# Altium PCB PCB2.PcbDoc (part 1 of 3)
Units mm, origin at the board's own origin, x right, y up, seen from the top; angles counter-clockwise.
Board outline 152.4 x 101.6 mm, 4 copper layers (Top Layer, Int1 (GND), Int2 (PWR), Bottom Layer), stack 1.569 mm thick; 115 components, 81 nets, 561 pads, 241 vias.
Unrouted connection lines stored in the file: 9.
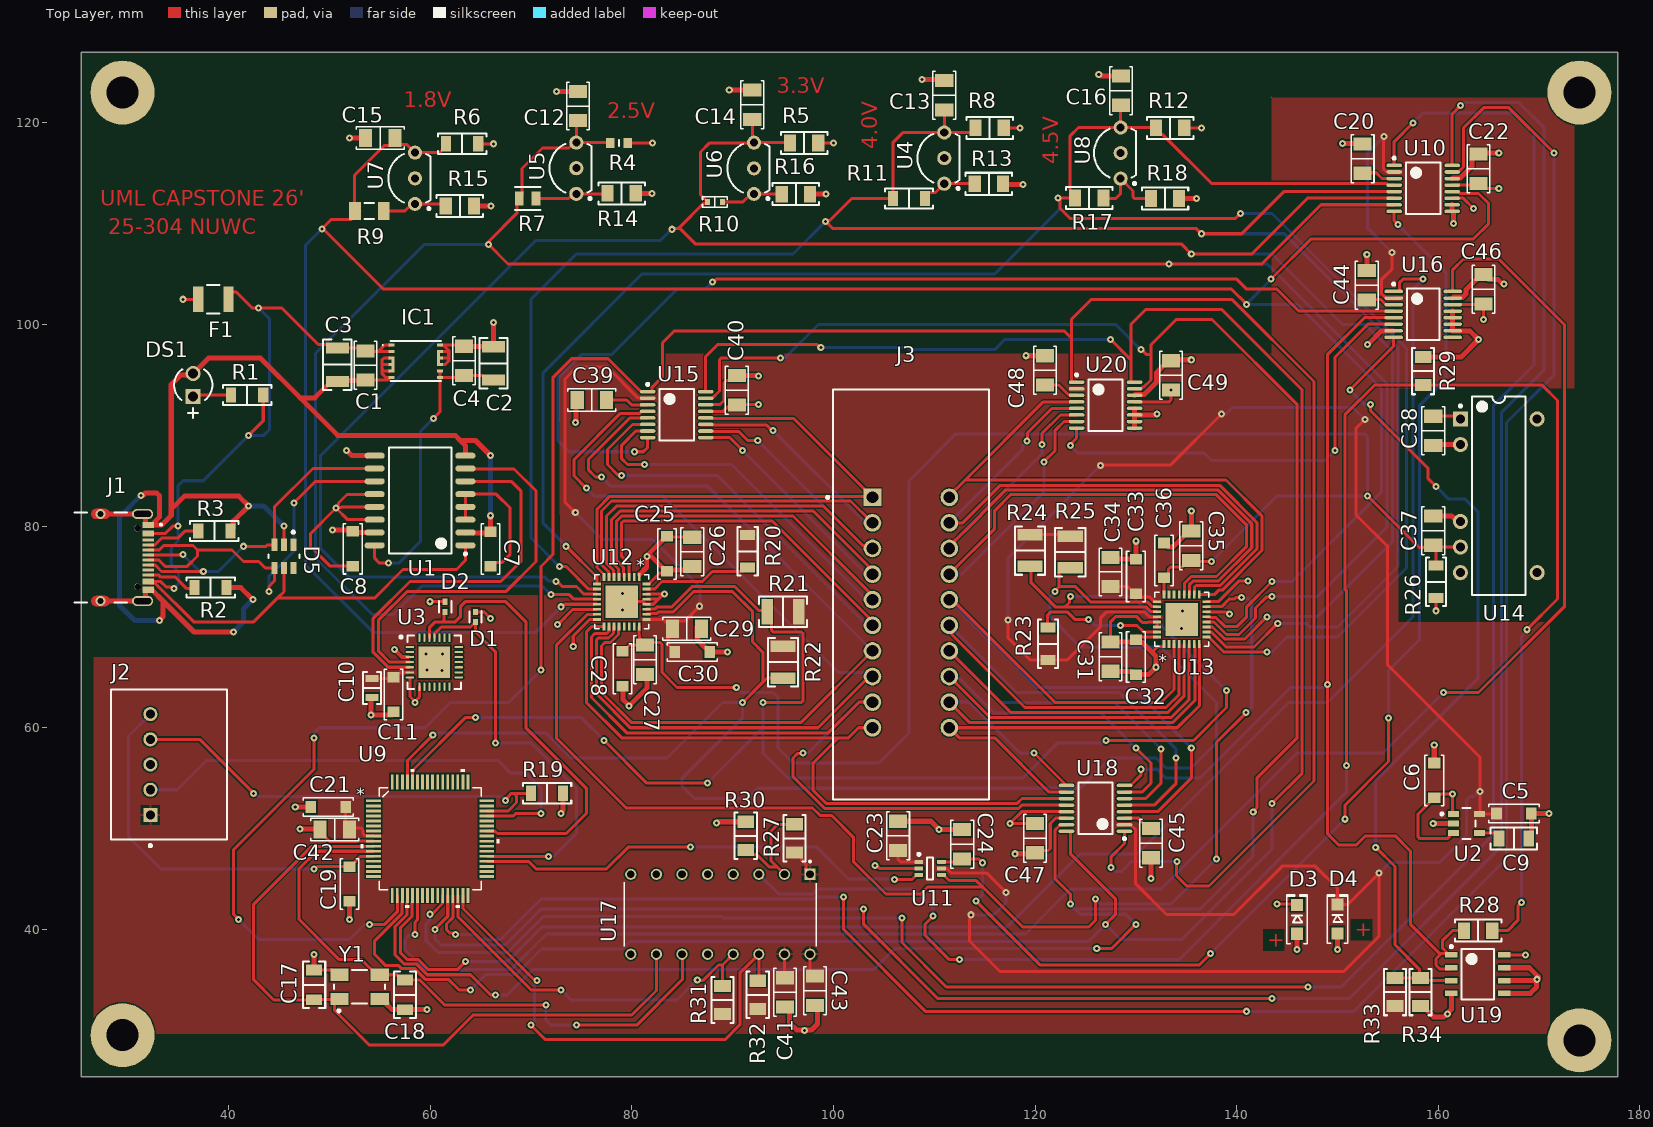
[diagram p0: Top Layer view]
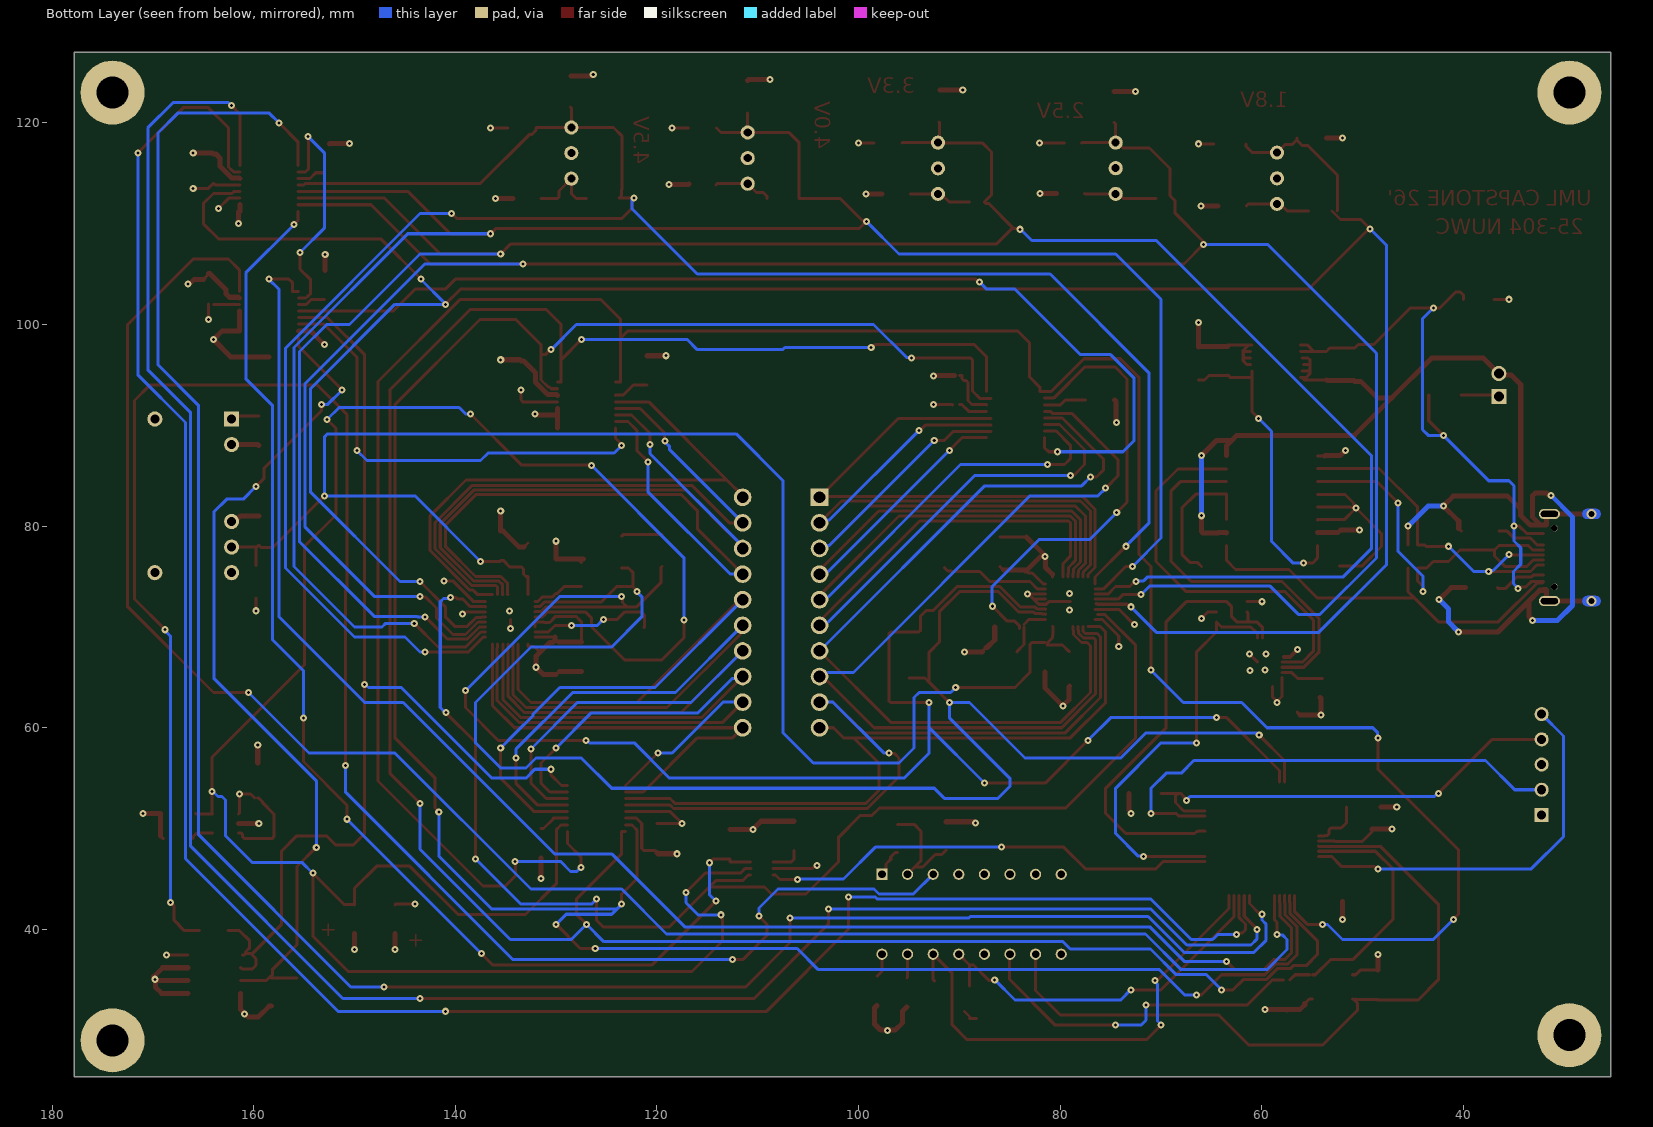
[diagram p1: Bottom Layer view, seen from below]
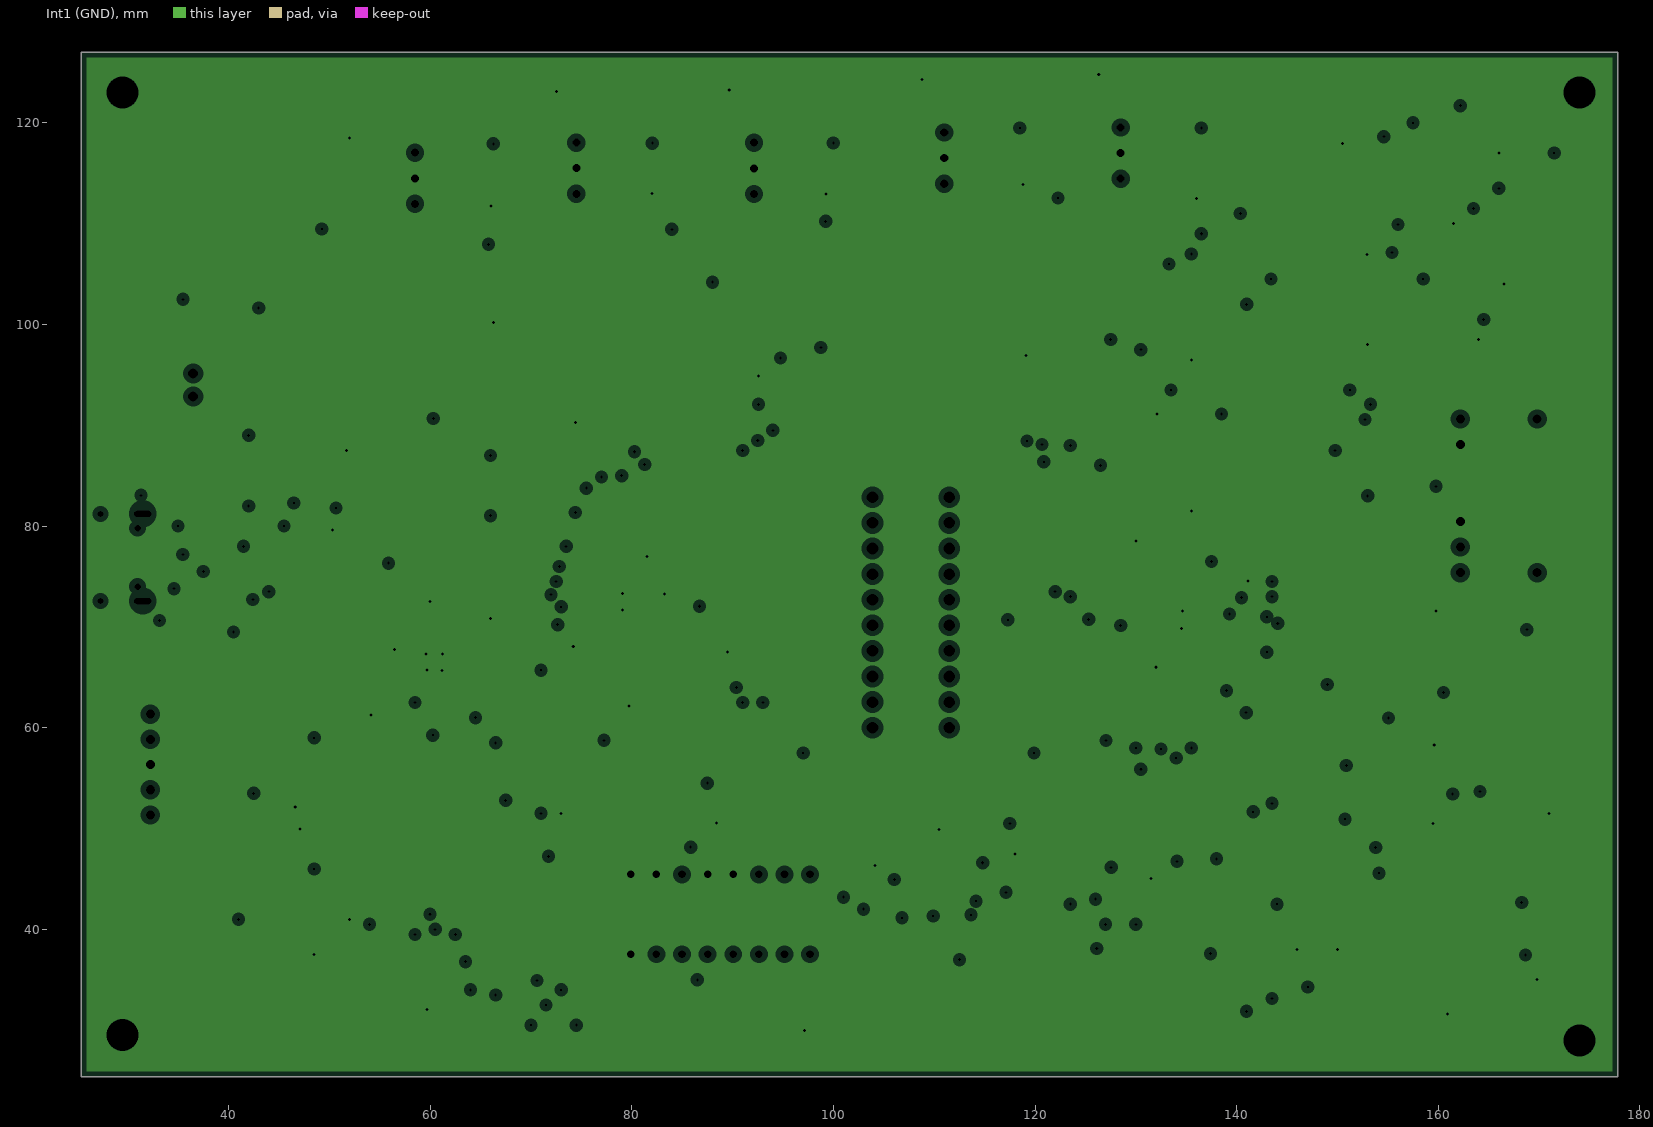
[diagram p2: Int1 (GND), clearances drawn from the general rule]
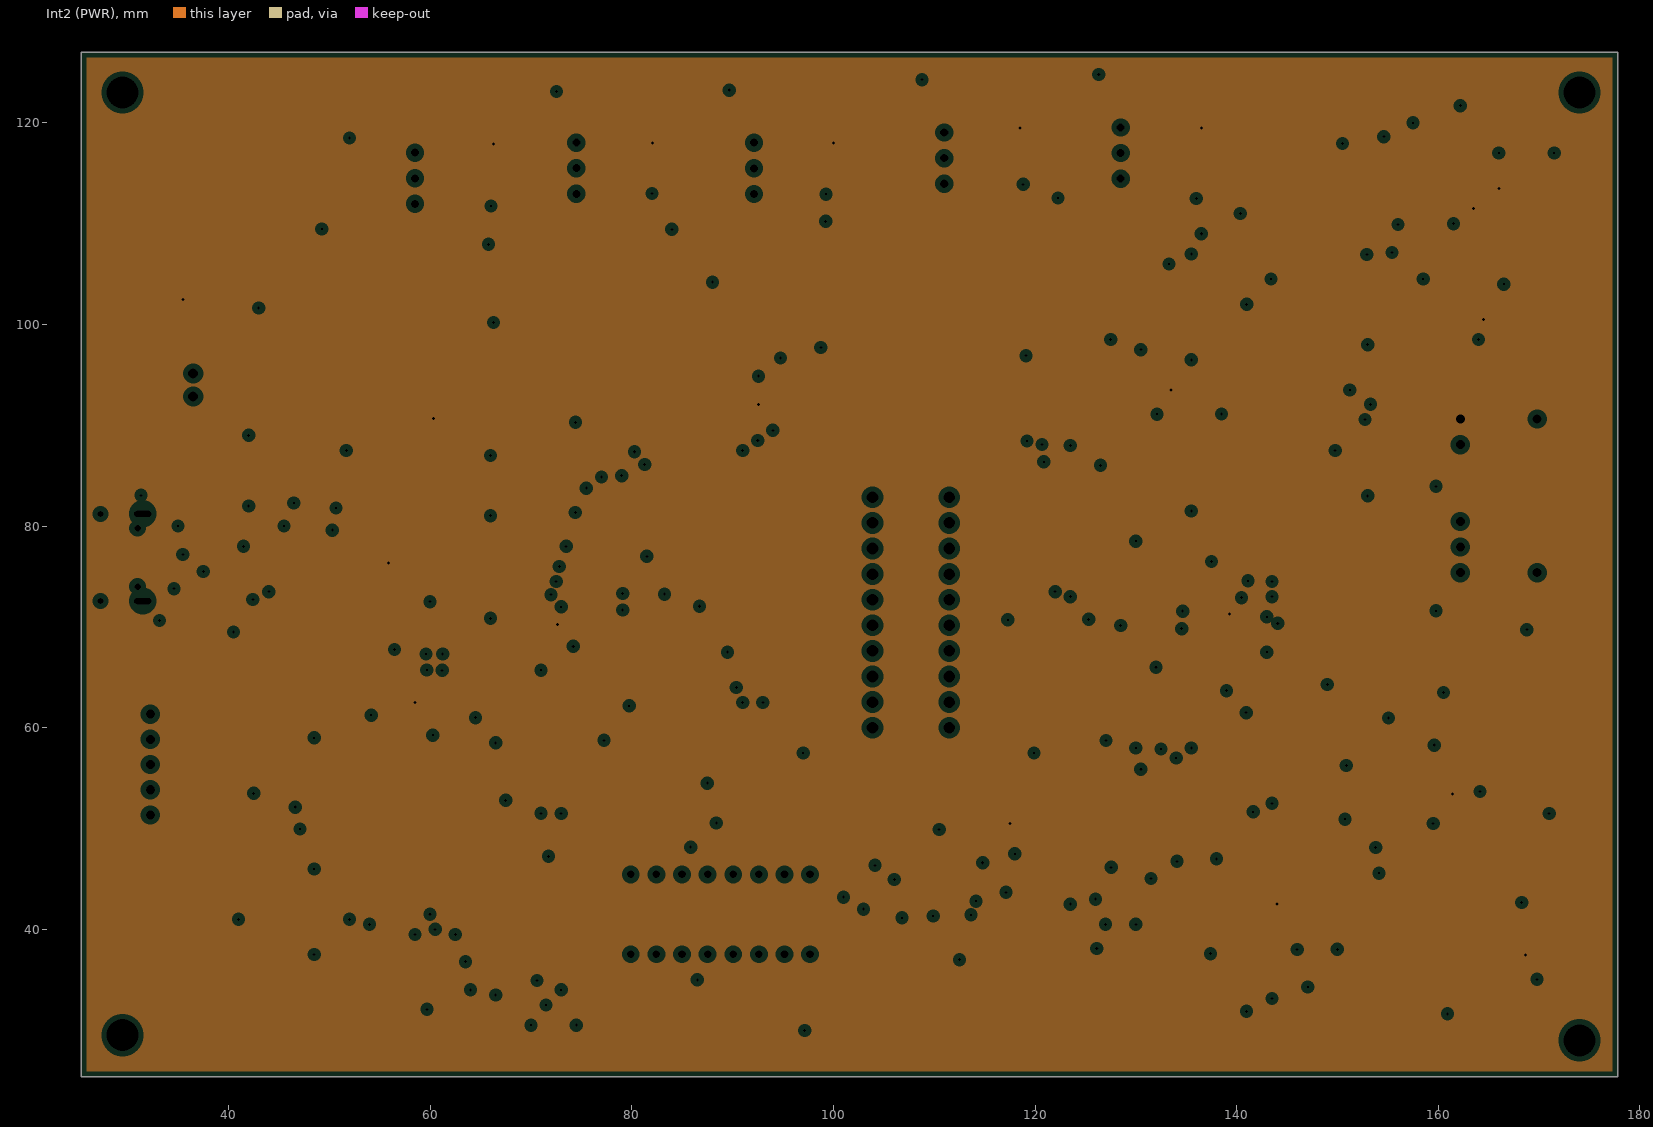
[diagram p3: Int2 (PWR), clearances drawn from the general rule]
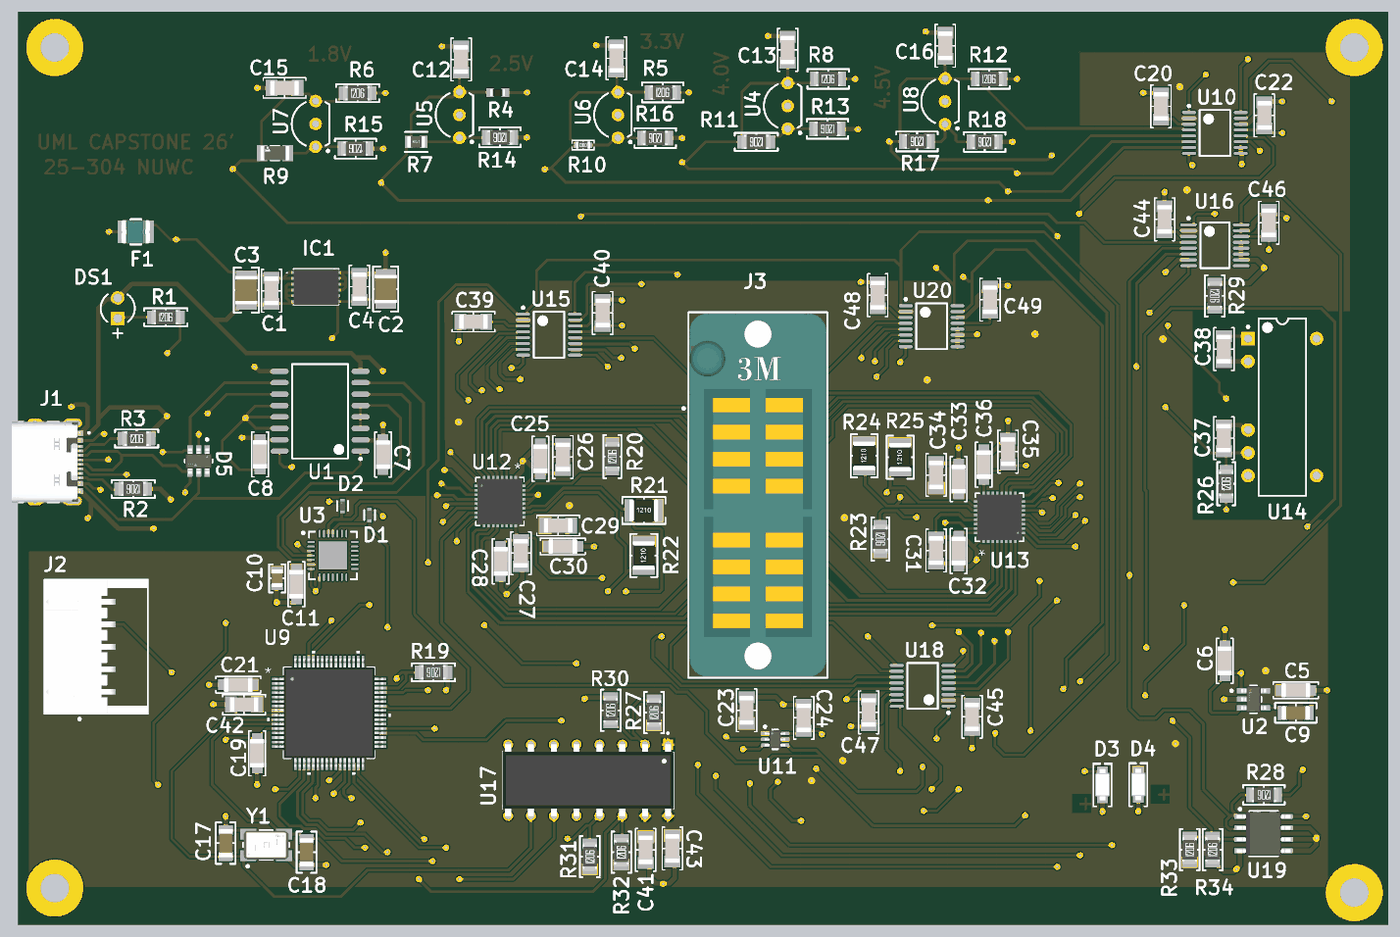
[diagram p5: 3D render of the assembled board from above, using the file's embedded part models]

## Layer stack, top to bottom
Top Solder: solder mask 0.0254, SM-001, Dk 3.5
Top Layer: signal copper 0.035
Dielectric 1: prepreg 0.1295, FR-4, Dk 4.3
Dielectric 2: prepreg 0.1295, FR-4, Dk 4.3
Int1 (GND): plane copper 0.035, net GND_ISO
Dielectric 3: core 0.9112, FR-4, Dk 4.3
Int2 (PWR): plane copper 0.035, net 5V_ISO
Dielectric 4: prepreg 0.1295, FR-4, Dk 4.3
Dielectric 5: prepreg 0.1295, FR-4, Dk 4.3
Bottom Layer: signal copper 0.035
Bottom Solder: solder mask 0.0254, SM-001, Dk 3.5

## Board outline
25.4,25.4 177.8,25.4 177.8,127 25.4,127

## Design rules (kind name [scope] priority, off if disabled: settings)
Clearance [All] p1: gap=0.15 ignorepadtopadclearanceinfootprint=FALSE
HoleSize [All] p1: absolutevalues=TRUE maxlimit=3.175 minlimit=0.025 maxpercent=80.000 minpercent=20.000
MinimumSolderMaskSliver [All] p1: minsoldermaskwidth=0.15
PlaneClearance [All] p1: clearance=0.508
PlaneConnect [All] p1: planeconnectstyle=Relief reliefexpansion=0.508 reliefentries=4 reliefconductorwidth=0.254 reliefairgap=0.254
PolygonConnect [All] p1: thpad.connectstyle=Relief thpad.reliefconductorwidth=0.254 thpad.reliefentries=4 thpad.polygonreliefangle="90 Angle" thpad.airgapwidth=0.254 smdpad.connectstyle=Direct smdpad.reliefconductorwidth=0.254 smdpad.reliefentries=4 smdpad.polygonreliefangle="90 Angle" smdpad.airgapwidth=0.254 via.connectstyle=Direct via.reliefconductorwidth=0.254 via.reliefentries=4 via.polygonreliefangle="90 Angle" via.airgapwidth=0.254
RoutingVias [All] p1: holewidth=0.3 width=0.7 viastyle="Through Hole" minholewidth=0.25 minwidth=0.6 maxholewidth=0.3 maxwidth=0.7
SilkToSilkClearance [All] p1: silktosilkclearance=0.15
SilkToSolderMaskClearance [IsPad] p1: minsilkscreentomaskgap=0.15 clearancetoexposedcopper=TRUE
SolderMaskExpansion [All] p1: expansion=0.05 istentingtop=FALSE
SupplyNets "Schematic Supply Nets" [InNet('9V')] p1: voltage=0.000
SupplyNets "Schematic Supply Nets_6" [InNet('GND_ISO')] p2: voltage=0.000
SupplyNets "Schematic Supply Nets_5" [InNet('5V_ISO')] p3: voltage=0.000
SupplyNets "Schematic Supply Nets_4" [InNet('VBUS')] p4: voltage=0.000
SupplyNets "Schematic Supply Nets_3" [InNet('VDD')] p5: voltage=0.000
SupplyNets "Schematic Supply Nets_1" [InNet('USBGND')] p6: voltage=0.000
UnRoutedNet [All] p1: checkbadconnections=TRUE
Width USB_GND_width [InNet('USBGND')] p1: maxlimit=1 minlimit=0.254 preferedwidth=0.5
Width GND_ISO_width [InNet('GND_ISO')] p2: maxlimit=1 minlimit=0.254 preferedwidth=0.5
Width [All] p3: maxlimit=1 minlimit=0.15 preferedwidth=0.3
23 further rules are at their usual default settings.

## Components (designator, comment, footprint, x,y, rotation, side; value= is the part's Value field where it differs from the comment)
C1 "885342208013" "CAP 1206_3216 - 0.8MM" 53.594,95.938 r90 top value=15nF
C2 "GRM32ER71E226ME15L" "MURATA - GRM32E" 66.294,96.139 r270 top value=22µF
C3 "GRM32ER71H106MA12L" "MURATA - GRM32E" 50.8,96.011 r90 top value=10µF
C4 "885342208013" "CAP 1206_3216 - 0.8MM" 63.373,96.393 r270 top value=15nF
C5 "GCM31CL8EL225KE07L" "MURATA CAP GCM31M 1206_3216" 167.5,51.5 r180 top value=2.2µF
C6 "GCM31CL8EL225KE07L" "MURATA CAP GCM31M 1206_3216" 159.6,54.775 r270 top value=2.2µF
C7 "GCM31C5C1H104FA16L" "MURATA CAP GCM31M 1206_3216" 66,77.725 r270 top value=100nF
C8 "GCM31C5C1H104FA16L" "MURATA CAP GCM31M 1206_3216" 52.325,77.75 r270 top value=100nF
C9 "GRM31B7U2E103JW31L" "MURATA CAP GRM31B 1206_3216" 167.5,49 r180 top value=10nF
C10 "GRM21BR71A475KE51L" "MURATA GRM21B 0805_2012" 54.225,63.95 r90 top value=4.7µF
C11 "GCM31C5C1H104FA16L" "MURATA CAP GCM31M 1206_3216" 56.375,63.3 r90 top value=100nF
C12 "VJ1206Y104KXXAC" "CAP 1206_3216 - 0.8MM" 74.676,121.666 r270 top value=100nF
C13 "VJ1206Y104KXXAC" "CAP 1206_3216 - 0.8MM" 110.998,122.735 r270 top value=100nF
C14 "VJ1206Y104KXXAC" "CAP 1206_3216 - 0.8MM" 91.948,121.793 r270 top value=100nF
C15 "VJ1206Y104KXXAC" "CAP 1206_3216 - 0.8MM" 55.05,118.5 r0 top value=100nF
C16 "VJ1206Y104KXXAC" "CAP 1206_3216 - 0.8MM" 128.524,123.19 r270 top value=100nF
C17 "GRM31A5C2H150JW01D" "MURATA CAP GRM31A 1206_3216" 48.5,34.5 r270 top value=15pF
C18 "GRM31A5C2H150JW01D" "MURATA CAP GRM31A 1206_3216" 57.5,33.5 r270 top value=15pF
C19 "GCM31C5C1H104FA16L" "MURATA CAP GCM31M 1206_3216" 52,44.5 r90 top value=100nF
C20 "C1206X104G4HAC7800" "CAP 1206_3216 - 0.8MM" 152.5,116.45 r90 top value=100nF
C21 "GCM31C5C1H104FA16L" "MURATA CAP GCM31M 1206_3216" 49.9,52.125 r0 top value=100nF
C22 "C1206X104G4HAC7800" "CAP 1206_3216 - 0.8MM" 164,115.45 r90 top value=100nF
C23 "C1206X104G4HAC7800" "CAP 1206_3216 - 0.8MM" 106.426,49.276 r270 top value=100nF
C24 "C1206X104G4HAC7800" "CAP 1206_3216 - 0.8MM" 112.776,48.44 r270 top value=100nF
C25 "GCM31CM8EG106KE08L" "MURATA CAP GCM31M 1206_3216" 83.5,77.25 r90 top value=10µF
C26 "C1206X104G4HAC7800" "CAP 1206_3216 - 0.8MM" 86,77.45 r90 top value=100nF
C27 "C1206X104G4HAC7800" "CAP 1206_3216 - 0.8MM" 81.325,66.75 r90 top value=100nF
C28 "GCM31CM8EG106KE08L" "MURATA CAP GCM31M 1206_3216" 79.075,65.85 r90 top value=10µF
C29 "C1206X104G4HAC7800" "CAP 1206_3216 - 0.8MM" 85.475,69.825 r180 top value=100nF
C30 "GCM31CM8EG106KE08L" "MURATA CAP GCM31M 1206_3216" 86,67.5 r180 top value=10µF
C31 "C1206X104G4HAC7800" "CAP 1206_3216 - 0.8MM" 127.5,67.05 r270 top value=100nF
C32 "GCM31CM8EG106KE08L" "MURATA CAP GCM31M 1206_3216" 130,67 r270 top value=10µF
C33 "GCM31CM8EG106KE08L" "MURATA CAP GCM31M 1206_3216" 130,75 r270 top value=10µF
C34 "C1206X104G4HAC7800" "CAP 1206_3216 - 0.8MM" 127.5,75.45 r270 top value=100nF
C35 "C1206X104G4HAC7800" "CAP 1206_3216 - 0.8MM" 135.5,78.05 r270 top value=100nF
C36 "GCM31CM8EG106KE08L" "MURATA CAP GCM31M 1206_3216" 132.798,76.599 r270 top value=10µF
C37 "C1206X104G4HAC7800" "CAP 1206_3216 - 0.8MM" 159.5,79.55 r270 top value=100nF
C38 "CC1206ZRY5V8BB225" "CAP 1206_3216 - 0.8MM" 159.5,89.45 r90 top value=2.2µF
C39 "C1206X104G4HAC7800" "CAP 1206_3216 - 0.8MM" 76.05,92.5 r0 top value=100nF
C40 "C1206X104G4HAC7800" "CAP 1206_3216 - 0.8MM" 90.424,93.472 r270 top value=100nF
C41 "C1206X104G4HAC7800" "CAP 1206_3216 - 0.8MM" 95.2,33.75 r270 top value=100nF
C42 "C1206X104G4HAC7800" "CAP 1206_3216 - 0.8MM" 50.546,49.911 r180 top value=100nF
C43 "C1206X104G4HAC7800" "CAP 1206_3216 - 0.8MM" 98.171,33.909 r270 top
C44 "C1206X104G4HAC7800" "CAP 1206_3216 - 0.8MM" 152.908,103.886 r270 top value=100nF
C45 "C1206X104G4HAC7800" "CAP 1206_3216 - 0.8MM" 131.5,48.55 r90 top value=100nF
C46 "C1206X104G4HAC7800" "CAP 1206_3216 - 0.8MM" 164.5,103.5 r90 top value=100nF
C47 "C1206X104G4HAC7800" "CAP 1206_3216 - 0.8MM" 120,49.05 r270 top value=100nF
C48 "C1206X104G4HAC7800" "CAP 1206_3216 - 0.8MM" 121,95.45 r270 top value=100nF
C49 "C1206X104G4HAC7800" "CAP 1206_3216 - 0.8MM" 133.5,94.95 r90 top value=100nF
D1 "TPD1E10B06DPYR" FP-DPY0002A-MFG 64.5,71 r270 top
D2 "TPD1E10B06DPYR" FP-DPY0002A-MFG 61.5,72 r270 top
D3 "SMF5.0A" SOD123F 146,41 r90 top
D4 "SMF5.0A" SOD123F 149.987,41.021 r90 top
D5 "USBLC6-4SC6" FP-SOT23-6L-MFG 45.5,77 r270 top value=3pF
DS1 "304090040" LED-2P-2.28-3MM 36.5,94 r90 top
F1 "MICROSMD050F-2" FP-microSMD-MFG 38.5,102.5 r180 top value=0.25-0.9Ω
IC1 "UCC33420QRAQRQ1" UCC33020QRAQRQ1 58.56,96.352 r0 top
J1 "USB4105GFA060" GCT_USB4105GFA060 27.306,76.888 r270 top
J2 "S5B-XH-A-1(LF)(SN)" FP-S5B-XH-A-1_LF_SN-MFG 34.1,56.35 r270 top
J3 "220-3342-00-0602J" FP-220-3342-00-0602J-0 107.69,73.22 r90 top
R1 "RC1206FR-101KL" "YAGEO RES 1206_3216" 41.85,93 r0 top
R2 "RP1206BRD075K1L" "YAGEO RES 1206_3216" 38.225,73.9 r180 top
R3 "RP1206BRD075K1L" "YAGEO RES 1206_3216" 38.6,79.5 r0 top
R4 "UPTF0603-16W-N-1781FT" RESC1608X55N 78.74,117.983 r0 top
R5 "RQ73C2B1K69BTD" "RES 1206_3216" 97.1,118 r0 top
R6 "RT1206BRD07442RL" "YAGEO RES 1206_3216" 63.175,117.925 r0 top
R7 "RN73R2ATTD5561B25" FP-RN73R2A-IPC_C 69.675,112.5 r180 top
R8 "KTR18EZPF2491" "RES 1206_3216" 115.5,119.5 r0 top
R9 "CRCW120657K6FKEA" FP-CRCW1206-e3-IPC_B 53.975,111.252 r180 top
R10 "RN73R1JTTD4171B25" "KOA RES RK73 RN73 0603_1608" 88.243,112.141 r180 top value="4.17 kOhms"
R11 "RT1206BRD072K55L" "YAGEO RES 1206_3216" 107.5,112.5 r180 top
R12 "KTR18EZPF2491" "RES 1206_3216" 133.4,119.5 r0 top
R13 "KTR18EZPF2491" "RES 1206_3216" 115.425,113.95 r180 top
R14 "KTR18EZPF2491" "RES 1206_3216" 79,113 r180 top
R15 "KTR18EZPF2491" "RES 1206_3216" 62.95,111.75 r180 top
R16 "KTR18EZPF2491" "RES 1206_3216" 96.275,112.93 r180 top
R17 "RK73H2BTTD1131F" "RES 1206_3216" 125.375,112.55 r180 top
R18 "KTR18EZPF2491" "RES 1206_3216" 132.9,112.5 r180 top
R19 "RT1206BRD075KL" "YAGEO RES 1206_3216" 71.6,53.5 r180 top
R20 "RP1206BRD0710KL" "YAGEO RES 1206_3216" 91.5,77.5 r90 top
R21 "SG732ETTD222K" "RES 1210_3225" 95,71.5 r0 top
R22 "SG732ETTD222K" "RES 1210_3225" 95,66.5 r90 top
R23 "RP1206BRD0710KL" "YAGEO RES 1206_3216" 121.3,68.325 r270 top
R24 "SG732ETTD222K" "RES 1210_3225" 119.5,77.575 r90 top
R25 "SG732ETTD222K" "RES 1210_3225" 123.5,77.425 r90 top
R26 "RT1206BRD07125RL" "YAGEO RES 1206_3216" 159.766,74.473 r90 top
R27 "TNPW120610K0BETY" "RES 1206_3216" 96.139,49.025 r90 top
R28 "TNPW120610K0BETY" "RES 1206_3216" 163.957,39.878 r180 top
R29 "TNPW120620K0BYEN" "RES 1206_3216" 158.496,95.38 r270 top
R30 "TNPW120610K0BETY" "RES 1206_3216" 91.313,49.279 r90 top
R31 "TNPW12064K70BEEA" "RES 1206_3216" 89,33 r90 top
R32 "TNPW12064K70BEEA" "RES 1206_3216" 92.5,33.5 r90 top
R33 "TNPW1206100KBEEA" "RES 1206_3216" 155.702,33.782 r90 top
R34 "TNPW1206100KBEEA" "RES 1206_3216" 158.242,33.782 r90 top
U1 "ADUM4160BRWZ" RW-16_L 59,82.539 r180 top
U2 "TPS7A2033PDBVR" FP-DBV0005A-MFG 162.8,50.5 r0 top
U3 "CP2102-GM" SLAB-QFN-28-3125x3125TP_N 60.425,66.5 r0 top
U4 "TLV431CLPE3" TI-LP3 111,116.5 r0 top
U5 "TLV431CLPE3" TI-LP3 74.5,115.5 r0 top
U6 "TLV431CLPE3" TI-LP3 92.125,115.49 r0 top
U7 "TLV431CLPE3" TI-LP3 58.5,114.5 r0 top
U8 "TLV431CLPE3" TI-LP3 128.5,117 r0 top
U9 "STM32C071RBT6" LQFP-64_STM 60,49 r0 top
U10 "ADG708BRUZ-REEL" ADI-RU-16_N 158.5,113.5 r0 top
U11 "SN74LVC1T45DCKT" DCK0006A_N 109.6,46.05 r0 top
U12 "ADG2128BCPZ-REEL7" CP_32_7_ADI 79,72.5 r0 top
U13 "ADG2128BCPZ-REEL7" CP_32_7_ADI 134.548,70.75 r180 top
U14 "DCP020509P" NVA0007A 166,83 r0 top
U15 "ADG708BRUZ-REEL" ADI-RU-16_N 84.455,91.059 r0 top
U16 "ADG709BRUZ-REEL" ADI-RU-16_M 158.5,101 r0 top
U17 "NAU7802KGI" DIP792W45P254L1904H533Q16 88.796,41.5 r270 top
U18 "ADG708BRUZ-REEL" ADI-RU-16_N 126,52 r180 top
U19 "LME49721MAX/NOPB" D0008A_L 163.915,35.56 r0 top
U20 "ADG708BRUZ-REEL" ADI-RU-16_N 127,92 r0 top
Y1 "ABM3B-24.000MHZ-10-1-U-T" FP-ABM3B-MFG 53,34.3 r0 top

## Footprints (in the part's own frame and the unit in brackets; to place one, negate y for a bottom-side part, rotate by r counter-clockwise, add the part's x,y. Pads: shape width x height; smd on the part's side, far side on the other; paste and mask are expansions set on the pad)
ADI-RU-16_M [mm] "SOP, 16-Leads, Body 5x4.4mm, Pitch 0.65mm, IPC Low Density"
  oval 1.85x0.35 smd: 1(-2.925,2.275) 2(-2.925,1.625) 3(-2.925,0.975) 4(-2.925,0.325) 5(-2.925,-0.325) 6(-2.925,-0.975) 7(-2.925,-1.625) 8(-2.925,-2.275) 9(2.925,-2.275) 10(2.925,-1.625) 11(2.925,-0.975) 12(2.925,-0.325) 13(2.925,0.325) 14(2.925,0.975) 15(2.925,1.625) 16(2.925,2.275)
  silkscreen extent -3.05,-2.55 1.6,3.12, body extent -2.25,-2.55 2.25,2.55, height 1.2
ADI-RU-16_N [mm] "SOP, 16-Leads, Body 5x4.4mm, Pitch 0.65mm, IPC Medium Density"
  oval 1.55x0.35 smd: 1(-2.875,2.275) 2(-2.875,1.625) 3(-2.875,0.975) 4(-2.875,0.325) 5(-2.875,-0.325) 6(-2.875,-0.975) 7(-2.875,-1.625) 8(-2.875,-2.275) 9(2.875,-2.275) 10(2.875,-1.625) 11(2.875,-0.975) 12(2.875,-0.325) 13(2.875,0.325) 14(2.875,0.975) 15(2.875,1.625) 16(2.875,2.275)
  silkscreen extent -3,-2.55 1.7,3.12, body extent -2.25,-2.55 2.25,2.55, height 1.2
"CAP 1206_3216 - 0.8MM" [mm] "Chip Capacitor, 2-Leads, Body 3.25x1.60mm, IPC Medium Density"
  rect 1.3x1.8 smd: 1(-1.45,0) 2(1.45,0)
  silkscreen extent -2.37,-1.12 2.37,1.12, body extent -1.6,-0.8 1.6,0.8, height 0.8
CP_32_7_ADI [mm]
  rect 0.275x0.805 smd paste+0 mask+0: 1(1.75,2.452) 2(1.25,2.452) 3(0.75,2.452) 4(0.25,2.452) 5(-0.25,2.452) 6(-0.75,2.452) 7(-1.25,2.452) 8(-1.75,2.452) 17(-1.75,-2.452) 18(-1.25,-2.452) 19(-0.75,-2.452) 20(-0.25,-2.452) 21(0.25,-2.452) 22(0.75,-2.452) 23(1.25,-2.452) 24(1.75,-2.452)
  rect 0.805x0.275 smd paste+0 mask+0: 9(-2.452,1.75) 10(-2.452,1.25) 11(-2.452,0.75) 12(-2.452,0.25) 13(-2.452,-0.25) 14(-2.452,-0.75) 15(-2.452,-1.25) 16(-2.452,-1.75) 25(2.452,-1.75) 26(2.452,-1.25) 27(2.452,-0.75) 28(2.452,-0.25) 29(2.452,0.25) 30(2.452,0.75) 31(2.452,1.25) 32(2.452,1.75)
  rect 3.25x3.25 smd paste+0 mask+0: HTAB(0,0)
  silkscreen extent -2.68,-2.68 2.68,2.68, body extent -2.55,-2.55 2.55,2.55, height 0.8
D0008A_L [mm] "SOIC, 8-Leads, Body 5x4mm, Pitch 1.27mm, IPC High Density"
  rrect18% 1.25x0.55 smd: 1(-2.625,1.905) 2(-2.625,0.635) 3(-2.625,-0.635) 4(-2.625,-1.905) 5(2.625,-1.905) 6(2.625,-0.635) 7(2.625,0.635) 8(2.625,1.905)
  silkscreen extent -2.75,-2.5 1.6,2.85, body extent -3,-2.45 3,2.45, height 1.63
DCK0006A_N [mm] "SOT23, 6-Leads, Body 2.15x1.4mm, Pitch 0.65mm, IPC Medium Density"
  rrect25% 0.85x0.4 smd: 1(-1.125,0.65) 2(-1.125,0) 3(-1.125,-0.65) 4(1.125,-0.65) 5(1.125,0) 6(1.125,0.65)
  silkscreen extent -1.25,-1.1 0.3,1.52, body extent -1.14,-1 1.14,1, height 0.94
DIP792W45P254L1904H533Q16 [mm]
  rect 1.11x1.11 / inner round 1.11 / far side rect 1.11x1.11 hole 0.76 mask+0.102: 1(-3.962,8.89)
  round 1.11 hole 0.76 mask+0.102: 2(-3.962,6.35) 3(-3.962,3.81) 4(-3.962,1.27) 5(-3.962,-1.27) 6(-3.962,-3.81) 7(-3.962,-6.35) 8(-3.962,-8.89) 9(3.962,-8.89) 10(3.962,-6.35) 11(3.962,-3.81) 12(3.962,-1.27) 13(3.962,1.27) 14(3.962,3.81) 15(3.962,6.35) 16(3.962,8.89)
  silkscreen extent -5.33,-9.52 3.18,9.52, body extent -4.13,-9.52 4.13,9.52, height 5.33
FP-220-3342-00-0602J-0 [mm]
  rect 1.75x1.75 hole 1.15 paste-2539.97 mask+0: 1(9.64,3.81)
  round 1.75 hole 1.15 paste-2539.97 mask+0: 2(7.1,3.81) 3(4.56,3.81) 4(2.02,3.81) 5(-0.52,3.81) 6(-3.06,3.81) 7(-5.6,3.81) 8(-8.14,3.81) 9(-10.68,3.81) 10(-13.22,3.81) 11(-13.22,-3.81) 12(-10.68,-3.81) 13(-8.14,-3.81) 14(-5.6,-3.81) 15(-3.06,-3.81) 16(-0.52,-3.81) 17(2.02,-3.81) 18(4.56,-3.81) 19(7.1,-3.81) 20(9.64,-3.81)
  silkscreen extent -20.33,-7.73 20.33,8.37, body extent -20.43,-7.83 32.97,7.83, height 0.25
FP-ABM3B-MFG [mm]
  rect 1.8x1.2 smd paste+0 mask+0: 1(-2,-1.2) 2(2,-1.2) 3(2,1.2) 4(-2,1.2)
  silkscreen extent -2.55,-2.5 2.55,1.65, body extent -3,-1.9 3,1.9, height 0.25
FP-CRCW1206-e3-IPC_B [mm]
  rect 1.156x1.758 smd paste+0 mask+0: 1(-1.426,0) 2(1.426,0)
  silkscreen extent -0.47,-0.8 0.47,0.8, body extent -2.25,-1.13 2.25,1.13, height 0.25
FP-DBV0005A-MFG [mm]
  rrect17% 1.1x0.6 smd paste+0 mask+0: 1(-1.3,0.95) 2(-1.3,0) 3(-1.3,-0.95) 4(1.3,-0.95) 5(1.3,0.95)
  silkscreen extent -2.57,-1.53 0.87,1.53, body extent -1.95,-1.78 1.95,1.78, height 0.25
FP-DPY0002A-MFG [mm]
  rect 0.6x0.5 smd paste+0 mask+0: 1(-0.5,0) 2(0.5,0)
  silkscreen extent -0.56,-0.6 0.55,0.6, body extent -0.9,-0.45 0.9,0.45, height 0.25
FP-microSMD-MFG [mm]
  rect 1x2.5 smd paste+0 mask+0: 1(-1.5,0) 2(1.5,0)
  silkscreen extent -0.63,-1.4 0.63,1.4, body extent -2.1,-1.5 2.1,1.5, height 0.25
FP-RN73R2A-IPC_C [mil]
  rect 33.67x53.39 smd paste+0 mask+0: 1(-32.5,0) 2(32.5,0)
  silkscreen extent -49,-44 49,44, body extent -53,-32 53,32, height 10
FP-S5B-XH-A-1_LF_SN-MFG [mm]
  rect 1.4x1.4 hole 0.9 paste-2539.97 mask+0: 1(5,-1.85)
  round 1.4 hole 0.9 paste-2539.97 mask+0: 2(2.5,-1.85) 3(0,-1.85) 4(-2.5,-1.85) 5(-5,-1.85)
  silkscreen extent -7.45,-5.75 8.17,5.75, body extent -7.55,-5.85 7.55,5.85, height 0.25
FP-SOT23-6L-MFG [mm]
  rect 1.2x0.6 smd paste+0 mask+0: 1(-1.15,0.95) 2(-1.15,0) 3(-1.15,-0.95) 4(1.15,-0.95) 5(1.15,0) 6(1.15,0.95)
  silkscreen extent -2.52,-1.53 0.18,1.53, body extent -1.85,-1.63 1.85,1.63, height 0.25
GCT_USB4105GFA060 [mm]
  rect 0.6x1.15 smd: A1_B12(-3.2,4.755) A4_B9(-2.4,4.755) B1_A12(3.2,4.755) B4_A9(2.4,4.755)
  rect 0.3x1.15 smd: A5(-1.25,4.755) A6(-0.25,4.755) A7(0.25,4.755) A8(1.25,4.755) B5(1.75,4.755) B6(0.75,4.755) B7(-0.75,4.755) B8(-1.75,4.755)
  oval 1x2.1 hole 0.6 slot 1.7 at 90 deg: SH1(-4.32,4.18) SH2(4.32,4.18)
  round 1 hole 0.6 mask+0: SH3(-4.32,0) SH4(4.32,0)
  round 0.65 hole 0.65 unplated: ""(-2.89,3.68) ""(2.89,3.68)
  Top Layer region: 4.346,0.899 4.372,0.897 4.398,0.894 4.424,0.889 4.449,0.883 4.475,0.876 4.499,0.867 4.523,0.857 4.547,0.846 4.57,0.833 4.592,0.819 4.614,0.805 4.635,0.789 4.655,0.772 4.674,0.754 4.692,0.735 4.709,0.715 4.725,0.694 4.739,0.672 4.753,0.65 4.766,0.627 4.777,0.603 4.787,0.579 4.796,0.555 4.803,0.529 4.809,0.504 4.814,0.478 4.817,0.452 4.819,0.426 4.82,0.4 4.82,0 4.82,-0.4 4.819,-0.426 4.817,-0.452 4.814,-0.478 4.809,-0.504 4.803,-0.529 4.796,-0.555 4.787,-0.579 4.777,-0.603 4.766,-0.627 4.753,-0.65 4.739,-0.672 4.725,-0.694 4.709,-0.715 4.692,-0.735 4.674,-0.754 4.655,-0.772 4.635,-0.789 4.614,-0.805 4.592,-0.819 4.57,-0.833 4.547,-0.846 4.523,-0.857 4.499,-0.867 4.475,-0.876 4.449,-0.883 4.424,-0.889 4.398,-0.894 4.372,-0.897 4.346,-0.899 4.32,-0.9 4.294,-0.899 4.268,-0.897 4.242,-0.894 4.216,-0.889 4.191,-0.883 4.165,-0.876 4.141,-0.867 4.117,-0.857 4.093,-0.846 4.07,-0.833 4.048,-0.819 4.026,-0.805 4.005,-0.789 3.985,-0.772 3.966,-0.754 3.948,-0.735 3.931,-0.715 3.915,-0.694 3.901,-0.672 3.887,-0.65 3.874,-0.627 3.863,-0.603 3.853,-0.579 3.844,-0.555 3.837,-0.529 3.831,-0.504 3.826,-0.478 3.823,-0.452 3.821,-0.426 3.82,-0.4 3.82,0 3.82,0.4 3.821,0.426 3.823,0.452 3.826,0.478 3.831,0.504 3.837,0.529 3.844,0.555 3.853,0.579 3.863,0.603 3.874,0.627 3.887,0.65 3.901,0.672 3.915,0.694 3.931,0.715 3.948,0.735 3.966,0.754 3.985,0.772 4.005,0.789 4.026,0.805 4.048,0.819 4.07,0.833 4.093,0.846 4.117,0.857 4.141,0.867 4.165,0.876 4.191,0.883 4.216,0.889 4.242,0.894 4.268,0.897 4.294,0.899 4.32,0.9
  Top Layer region: -4.294,0.899 -4.268,0.897 -4.242,0.894 -4.216,0.889 -4.191,0.883 -4.165,0.876 -4.141,0.867 -4.117,0.857 -4.093,0.846 -4.07,0.833 -4.048,0.819 -4.026,0.805 -4.005,0.789 -3.985,0.772 -3.966,0.754 -3.948,0.735 -3.931,0.715 -3.915,0.694 -3.901,0.672 -3.887,0.65 -3.874,0.627 -3.863,0.603 -3.853,0.579 -3.844,0.555 -3.837,0.529 -3.831,0.504 -3.826,0.478 -3.823,0.452 -3.821,0.426 -3.82,0.4 -3.82,0 -3.82,-0.4 -3.821,-0.426 -3.823,-0.452 -3.826,-0.478 -3.831,-0.504 -3.837,-0.529 -3.844,-0.555 -3.853,-0.579 -3.863,-0.603 -3.874,-0.627 -3.887,-0.65 -3.901,-0.672 -3.915,-0.694 -3.931,-0.715 -3.948,-0.735 -3.966,-0.754 -3.985,-0.772 -4.005,-0.789 -4.026,-0.805 -4.048,-0.819 -4.07,-0.833 -4.093,-0.846 -4.117,-0.857 -4.141,-0.867 -4.165,-0.876 -4.191,-0.883 -4.216,-0.889 -4.242,-0.894 -4.268,-0.897 -4.294,-0.899 -4.32,-0.9 -4.346,-0.899 -4.372,-0.897 -4.398,-0.894 -4.424,-0.889 -4.449,-0.883 -4.475,-0.876 -4.499,-0.867 -4.523,-0.857 -4.547,-0.846 -4.57,-0.833 -4.592,-0.819 -4.614,-0.805 -4.635,-0.789 -4.655,-0.772 -4.674,-0.754 -4.692,-0.735 -4.709,-0.715 -4.725,-0.694 -4.739,-0.672 -4.753,-0.65 -4.766,-0.627 -4.777,-0.603 -4.787,-0.579 -4.796,-0.555 -4.803,-0.529 -4.809,-0.504 -4.814,-0.478 -4.817,-0.452 -4.819,-0.426 -4.82,-0.4 -4.82,0 -4.82,0.4 -4.819,0.426 -4.817,0.452 -4.814,0.478 -4.809,0.504 -4.803,0.529 -4.796,0.555 -4.787,0.579 -4.777,0.603 -4.766,0.627 -4.753,0.65 -4.739,0.672 -4.725,0.694 -4.709,0.715 -4.692,0.735 -4.674,0.754 -4.655,0.772 -4.635,0.789 -4.614,0.805 -4.592,0.819 -4.57,0.833 -4.547,0.846 -4.523,0.857 -4.499,0.867 -4.475,0.876 -4.449,0.883 -4.424,0.889 -4.398,0.894 -4.372,0.897 -4.346,0.899 -4.32,0.9
  Bottom Layer region: 4.346,0.899 4.372,0.897 4.398,0.894 4.424,0.889 4.449,0.883 4.475,0.876 4.499,0.867 4.523,0.857 4.547,0.846 4.57,0.833 4.592,0.819 4.614,0.805 4.635,0.789 4.655,0.772 4.674,0.754 4.692,0.735 4.709,0.715 4.725,0.694 4.739,0.672 4.753,0.65 4.766,0.627 4.777,0.603 4.787,0.579 4.796,0.555 4.803,0.529 4.809,0.504 4.814,0.478 4.817,0.452 4.819,0.426 4.82,0.4 4.82,0 4.82,-0.4 4.819,-0.426 4.817,-0.452 4.814,-0.478 4.809,-0.504 4.803,-0.529 4.796,-0.555 4.787,-0.579 4.777,-0.603 4.766,-0.627 4.753,-0.65 4.739,-0.672 4.725,-0.694 4.709,-0.715 4.692,-0.735 4.674,-0.754 4.655,-0.772 4.635,-0.789 4.614,-0.805 4.592,-0.819 4.57,-0.833 4.547,-0.846 4.523,-0.857 4.499,-0.867 4.475,-0.876 4.449,-0.883 4.424,-0.889 4.398,-0.894 4.372,-0.897 4.346,-0.899 4.32,-0.9 4.294,-0.899 4.268,-0.897 4.242,-0.894 4.216,-0.889 4.191,-0.883 4.165,-0.876 4.141,-0.867 4.117,-0.857 4.093,-0.846 4.07,-0.833 4.048,-0.819 4.026,-0.805 4.005,-0.789 3.985,-0.772 3.966,-0.754 3.948,-0.735 3.931,-0.715 3.915,-0.694 3.901,-0.672 3.887,-0.65 3.874,-0.627 3.863,-0.603 3.853,-0.579 3.844,-0.555 3.837,-0.529 3.831,-0.504 3.826,-0.478 3.823,-0.452 3.821,-0.426 3.82,-0.4 3.82,0 3.82,0.4 3.821,0.426 3.823,0.452 3.826,0.478 3.831,0.504 3.837,0.529 3.844,0.555 3.853,0.579 3.863,0.603 3.874,0.627 3.887,0.65 3.901,0.672 3.915,0.694 3.931,0.715 3.948,0.735 3.966,0.754 3.985,0.772 4.005,0.789 4.026,0.805 4.048,0.819 4.07,0.833 4.093,0.846 4.117,0.857 4.141,0.867 4.165,0.876 4.191,0.883 4.216,0.889 4.242,0.894 4.268,0.897 4.294,0.899 4.32,0.9
  Bottom Layer region: -4.294,0.899 -4.268,0.897 -4.242,0.894 -4.216,0.889 -4.191,0.883 -4.165,0.876 -4.141,0.867 -4.117,0.857 -4.093,0.846 -4.07,0.833 -4.048,0.819 -4.026,0.805 -4.005,0.789 -3.985,0.772 -3.966,0.754 -3.948,0.735 -3.931,0.715 -3.915,0.694 -3.901,0.672 -3.887,0.65 -3.874,0.627 -3.863,0.603 -3.853,0.579 -3.844,0.555 -3.837,0.529 -3.831,0.504 -3.826,0.478 -3.823,0.452 -3.821,0.426 -3.82,0.4 -3.82,0 -3.82,-0.4 -3.821,-0.426 -3.823,-0.452 -3.826,-0.478 -3.831,-0.504 -3.837,-0.529 -3.844,-0.555 -3.853,-0.579 -3.863,-0.603 -3.874,-0.627 -3.887,-0.65 -3.901,-0.672 -3.915,-0.694 -3.931,-0.715 -3.948,-0.735 -3.966,-0.754 -3.985,-0.772 -4.005,-0.789 -4.026,-0.805 -4.048,-0.819 -4.07,-0.833 -4.093,-0.846 -4.117,-0.857 -4.141,-0.867 -4.165,-0.876 -4.191,-0.883 -4.216,-0.889 -4.242,-0.894 -4.268,-0.897 -4.294,-0.899 -4.32,-0.9 -4.346,-0.899 -4.372,-0.897 -4.398,-0.894 -4.424,-0.889 -4.449,-0.883 -4.475,-0.876 -4.499,-0.867 -4.523,-0.857 -4.547,-0.846 -4.57,-0.833 -4.592,-0.819 -4.614,-0.805 -4.635,-0.789 -4.655,-0.772 -4.674,-0.754 -4.692,-0.735 -4.709,-0.715 -4.725,-0.694 -4.739,-0.672 -4.753,-0.65 -4.766,-0.627 -4.777,-0.603 -4.787,-0.579 -4.796,-0.555 -4.803,-0.529 -4.809,-0.504 -4.814,-0.478 -4.817,-0.452 -4.819,-0.426 -4.82,-0.4 -4.82,0 -4.82,0.4 -4.819,0.426 -4.817,0.452 -4.814,0.478 -4.809,0.504 -4.803,0.529 -4.796,0.555 -4.787,0.579 -4.777,0.603 -4.766,0.627 -4.753,0.65 -4.739,0.672 -4.725,0.694 -4.709,0.715 -4.692,0.735 -4.674,0.754 -4.655,0.772 -4.635,0.789 -4.614,0.805 -4.592,0.819 -4.57,0.833 -4.547,0.846 -4.523,0.857 -4.499,0.867 -4.475,0.876 -4.449,0.883 -4.424,0.889 -4.398,0.894 -4.372,0.897 -4.346,0.899 -4.32,0.9
  silkscreen extent -4.47,-2.6 4.47,6.1, body extent -4.47,-2.6 4.47,5.11, height 3.31
"KOA RES RK73 RN73 0603_1608" [mm] "Chip Resistor, 2-Leads, Body 1.60x0.80mm"
  rect 0.5x0.6 smd: 1(-0.75,0) 2(0.75,0)
  silkscreen extent -1.22,-0.52 1.22,0.52, body extent -0.8,-0.4 0.8,0.4, height 0.45
LED-2P-2.28-3MM [mm] "LED, 2-Leads, Dia 3mm, Pitch 2.28mm"
  rect 1.5x1.5 hole 1: 1(-1.14,0)
  round 1.5 hole 1: 2(1.14,0)
  silkscreen extent -3.29,-1.9 1.52,1.9, body extent -1.9,-1.91 1.52,1.91, height 5.3
LQFP-64_STM [mil]
  rect 58x11 smd: 1(-221.5,147.64) 2(-221.5,127.95) 3(-221.5,108.27) 4(-221.5,88.58) 5(-221.5,68.9) 6(-221.5,49.21) 7(-221.5,29.53) 8(-221.5,9.84) 9(-221.5,-9.84) 10(-221.5,-29.53) 11(-221.5,-49.21) 12(-221.5,-68.9) 13(-221.5,-88.58) 14(-221.5,-108.27) 15(-221.5,-127.95) 16(-221.5,-147.64) 33(221.5,-147.64) 34(221.5,-127.95) 35(221.5,-108.27) 36(221.5,-88.58) 37(221.5,-68.9) 38(221.5,-49.21) 39(221.5,-29.53) 40(221.5,-9.84) 41(221.5,9.84) 42(221.5,29.53) 43(221.5,49.21) 44(221.5,68.9) 45(221.5,88.58) 46(221.5,108.27) 47(221.5,127.95) 48(221.5,147.64)
  rect 11x58 smd: 17(-147.64,-221.5) 18(-127.95,-221.5) 19(-108.27,-221.5) 20(-88.58,-221.5) 21(-68.9,-221.5) 22(-49.21,-221.5) 23(-29.53,-221.5) 24(-9.84,-221.5) 25(9.84,-221.5) 26(29.53,-221.5) 27(49.21,-221.5) 28(68.9,-221.5) 29(88.58,-221.5) 30(108.27,-221.5) 31(127.95,-221.5) 32(147.64,-221.5) 49(147.64,221.5) 50(127.95,221.5) 51(108.27,221.5) 52(88.58,221.5) 53(68.9,221.5) 54(49.21,221.5) 55(29.53,221.5) 56(9.84,221.5) 57(-9.84,221.5) 58(-29.53,221.5) 59(-49.21,221.5) 60(-68.9,221.5) 61(-88.58,221.5) 62(-108.27,221.5) 63(-127.95,221.5) 64(-147.64,221.5)
  silkscreen extent -270,-270 270,270, body extent -236,-236 236,236, height 63
"MURATA - GRM32E" [mm] "Chip Capacitor, 2-Leads, Body 3.20x2.50mm"
  rect 1.1x2.3 smd: 1(-1.65,0) 2(1.65,0)
  silkscreen extent -2.5,-1.4 2.5,1.4, body extent -1.6,-1.25 1.6,1.25, height 2.5
"MURATA CAP GCM31M 1206_3216" [mm] "Chip Capacitor, 2-Leads, Body 3.25x1.60mm"
  rect 1.05x1.2 smd: 1(-1.725,0) 2(1.725,0)
  silkscreen extent -2.5,-0.92 2.5,0.92, body extent -1.6,-0.8 1.6,0.8, height 1.2
"MURATA CAP GRM31A 1206_3216" [mm] "Chip Capacitor, 2-Leads, Body 3.25x1.60mm"
  rect 1.05x1.6 smd: 1(-1.475,0) 2(1.475,0)
  silkscreen extent -2.3,-1.1 2.3,1.1, body extent -1.6,-0.8 1.6,0.8, height 1
"MURATA CAP GRM31B 1206_3216" [mm] "Chip Capacitor, 2-Leads, Body 3.25x1.60mm"
  rect 1.05x1.6 smd: 1(-1.475,0) 2(1.475,0)
  silkscreen extent -2.3,-1.1 2.3,1.1, body extent -1.6,-0.8 1.6,0.8, height 1.25
"MURATA GRM21B 0805_2012" [mm] "Chip Capacitor, 2-Leads, Body 2.00x1.25mm"
  rect 0.7x1.3 smd: 1(-0.95,0) 2(0.95,0)
  silkscreen extent -1.58,-0.9 1.58,0.9, body extent -1,-0.63 1,0.63, height 1.25
NVA0007A [mm] "DIP, 7-Leads, Body 19.18x6.605mm, Pitch 2.54mm, Row Spacing 7.62mm"
  rect 1.5x1.5 hole 0.9: 1(-3.81,7.62)
  round 1.5 hole 0.9: 2(-3.81,5.08) 5(-3.81,-2.54) 6(-3.81,-5.08) 7(-3.81,-7.62) 8(3.81,-7.62) 14(3.81,7.62)
  silkscreen extent -3.93,-9.85 2.65,9.85, body extent -3.95,-9.85 3.95,9.85, height 5.33
"RES 1206_3216" [mm] "Chip Resistor, 2-Leads, Body 3.13x1.55mm, IPC Medium Density"
  rect 1.2x1.65 smd: 1(-1.4,0) 2(1.4,0)
  silkscreen extent -2.3,-1.1 2.3,1.1, body extent -1.6,-0.8 1.6,0.8, height 0.6
"RES 1210_3225" [mm] "Chip Resistor, 2-Leads, Body 3.1x2.6mm, IPC Medium Density"
  rect 1.15x2.5 smd: 1(-1.575,0) 2(1.575,0)
  silkscreen extent -2.4,-1.5 2.4,1.5, body extent -1.6,-1.25 1.6,1.25, height 0.7
RESC1608X55N [mm]
  rect 0.85x1 smd: 1(-0.85,0) 2(0.85,0)
  silkscreen extent 0,-0.3 0,0.3, body extent -0.8,-0.4 0.8,0.4, height 0.55
RW-16_L [mm] "SOIC, 16-Leads, Body 10.3x7.5mm, Pitch 1.27mm, IPC High Density"
  oval 2x0.6 smd: 1(-4.5,4.445) 2(-4.5,3.175) 3(-4.5,1.905) 4(-4.5,0.635) 5(-4.5,-0.635) 6(-4.5,-1.905) 7(-4.5,-3.175) 8(-4.5,-4.445) 9(4.5,-4.445) 10(4.5,-3.175) 11(4.5,-1.905) 12(4.5,-0.635) 13(4.5,0.635) 14(4.5,1.905) 15(4.5,3.175) 16(4.5,4.445)
  silkscreen extent -4.62,-5.25 3.1,5.42, body extent -3.8,-5.25 3.8,5.25, height 2.65
SLAB-QFN-28-3125x3125TP_N [mm] "QFN, 28-Leads, Body 5x5mm, Pitch 0.5mm, Thermal Pad 3.13x3.13mm, IPC Medium Density"
  oval 0.85x0.2 smd: 1(-2.425,1.5) 2(-2.425,1) 3(-2.425,0.5) 4(-2.425,0) 5(-2.425,-0.5) 6(-2.425,-1) 7(-2.425,-1.5) 15(2.425,-1.5) 16(2.425,-1) 17(2.425,-0.5) 18(2.425,0) 19(2.425,0.5) 20(2.425,1) 21(2.425,1.5)
  oval 0.2x0.85 smd: 8(-1.5,-2.425) 9(-1,-2.425) 10(-0.5,-2.425) 11(0,-2.425) 12(0.5,-2.425) 13(1,-2.425) 14(1.5,-2.425) 22(1.5,2.425) 23(1,2.425) 24(0.5,2.425) 25(0,2.425) 26(-0.5,2.425) 27(-1,2.425) 28(-1.5,2.425)
  rect 3.13x3.13 smd: 29(0,0)
  silkscreen extent -3.42,-2.65 2.65,2.65, body extent -2.5,-2.5 2.5,2.5, height 1
SOD123F [mm] "SODFL, 2-Leads, Body 1.60x3.50mm, IPC Medium Density"
  rect 1.2x1.2 smd: 1(-1.43,0) 2(1.43,0)
  silkscreen extent -2.41,-1.02 2.41,1.02, body extent -1.75,-0.8 1.75,0.8, height 1.1
TI-LP3 [mm] "TO, Flat Index; 3 In-Line, Formed Axial Leads; Body Dia. 4.8mm; Leads 0.56 x 0.41 mm (max)"
  round 1.4 hole 0.8: 1(0,-2.54) 2(0,0) 3(0,2.54)
  silkscreen extent -2.65,-3.13 1.52,2.41, body extent -2.65,-2.66 1.52,2.66, height 9.33
UCC33020QRAQRQ1 [mm]
  rect 0.6x0.3 smd: 1(-2.4,1.625) 2(-2.4,0.975) 6(-2.4,-1.625) 7(2.4,-1.625) 8(2.4,-0.975) 12(2.4,1.625)
  rect 0.3x0.3 smd: 3(-2.55,0.325) 4(-2.55,-0.325) 5(-2.55,-0.975) 9(2.55,-0.325) 10(2.55,0.325) 11(2.55,0.975)
  rect 0.3x1.6 smd: 13(-2.25,-0.325) 14(2.25,0.325)
  silkscreen extent -3.3,-1.95 2.5,2, body extent -2.51,-2 2.51,2, height 1.01
"YAGEO RES 1206_3216" [mm] "Chip Resistor, 2-Leads, Body 3.13x1.55mm"
  rect 1x1.5 smd: 1(-1.6,0) 2(1.6,0)
  silkscreen extent -2.4,-1 2.4,1, body extent -1.6,-0.8 1.6,0.8, height 0.6

## Part data
C1 C4: library part CMP-001-059796-1, "CAP CER 15000PF 630V X7R 1206", Part Number=885342208013
C2: library part CMP-001-068110-1, "CAP CER 22UF 25V X7R 1210", Part Number=GRM32ER71E226ME15L
C3: library part CMP-001-068673-1, "CAP CER 10UF 50V X7R 1210", Part Number=GRM32ER71H106MA12L
C5 C6: library part CMP-001-063237-1, "CAP CER 2.2UF 100V X8L 1206", Part Number=GCM31CL8EL225KE07L
C7 C8 C11 C19 C21: library part CMP-001-060542-1, "CAP CER 0.1UF 50V C0G/NP0 1206", Part Number=GCM31C5C1H104FA16L
C9: library part CMP-001-062663-1, "CAP CER 10000PF 250V U2J 1206", Part Number=GRM31B7U2E103JW31L
C10: library part CMP-001-052117-1, "CAP CER 4.7UF 10V X7R 0805", Part Number=GRM21BR71A475KE51L
C12 C13 C14 C15 C16: library part CMP-001-062189-1, "CAP CER 0.1UF 25V X7R 1206", Part Number=VJ1206Y104KXXAC
C17 C18: library part CMP-001-059711-1, "CAP CER 15PF 500V C0G/NP0 1206", Part Number=GRM31A5C2H150JW01D
C20 C22 C23 C24 C26 C27 C29 C31 C34 C35 C37 C39 C40 C41 C42 C43 C44 C45 C46 C47 C48 C49: library part CMP-001-063573-1, "CAP CER 1206 0.1F 16V ULTRA STAB", Part Number=C1206X104G4HAC7800
C25 C28 C30 C32 C33 C36: library part CMP-001-063486-1, "CAP CER 10UF 35V X8M 1206", Part Number=GCM31CM8EG106KE08L
C38: library part CMP-001-058176-1, "CAP CER 2.2UF 25V Y5V 1206", Part Number=CC1206ZRY5V8BB225
D1 D2: library part CMP-0326-00004-4, "TVS DIODE 5.5V 14V 2X1SON", Breakdown Voltage=6V, Capacitance=12pF, Case/Package=0402, Clamping Voltage=14V, Leakage Current=100nA, Manufacturer="Texas Instruments", Max Operating Temperature=125°C, Min Operating Temperature=-40°C, Package Quantity=1, Peak Pulse Current=5A, Peak Pulse Power=90W, Power Line Protection=No, Reverse Standoff Voltage=5.5V, Test Current=1mA, Composition=Zener, Contact Plating=Gold, Direction=Bidirectional, Element Configuration=Single, ESD Protection=Yes, Height=0.35mm, Interface=GPIO, Lead Free="Lead Free", Length=1.1mm, Max Reverse Leakage Current=100nA, Min Breakdown Voltage=6V, Number of Bidirectional Channels=1, Number Of Channels=1, Number of Pins=2, Packaging="Tape and Reel", PartNumber=TPD1E10B06DPYR, Radiation Hardening=No, REACH SVHC="No SVHC", Width=0.7mm, Working Voltage=5.5V
D3 D4: library part CMP-004-19987-1, "TVS SOD123FL 5V 200W UNIDIR", Part Number=SMF5.0A
D5: library part CMP-2000-07370-2, "TVS DIODE 5.25V 17V SOT23-6", Breakdown Voltage=6V, Capacitance=3pF, Clamping Voltage=17V, Manufacturer=STMicroelectronics, Max Junction Temp=+125°C, Package=SOT23-6L, Peak Pulse Power=130W, Temperature="-40°C to +125°C", Temperature Range Low=-40°C, Automotive=No, Category=Diode, ComponentLink2Description=Datasheet, ComponentLink2URL=https://upverter.com/datasheet/23dc4ffb028d868909e80577610284b194f13213.pdf, Device Class L1="Circuit Protection", Device Class L2="ESD and Circuit Protection ICs", Device Class L3=unset, Digikey Description="TVS DIODE 5.25V 17V SOT23-6", Direction=Unidirectional, Height=1.45mm, Interface=USB,Ethernet,Other, Lead Free=Yes, Manufacturer Part Number=USBLC6-4SC6, Mouser Description="USBLC6 Series 4 Line 6 V Uni / Bi-Directional ESD Protection - SOT-23-6", Number Of Channels=4, Octopart=https://octopart.com/usblc6-4sc6-stmicroelectronics-347147, RoHS=TRUE, Standoff Height=0mm, Temperature Range High=+125°C
DS1: library part CMP-007-00006-2, "Green LED, 80 mW, 20 mA, -25 to 85 degC, 2-Pin THD", Manufacturer="Shenzhen CGX", Package Description="2-Pin Through Hole Device, Dia 3 mm, Pitch 2.28 mm", Case/Package=304090040, Datasheet URL=http://datasheet.octopart.com/304090040-Chengguangxing-datasheet-62330655.pdf, Datasheet Version="Rev. 1.0, 09/2014", Manufacturer URL=http://szcgx.com/, Mounting Technology=TH, Package Reference=304090040, RoHS Compliant=Unknown
F1: library part CMP-08606-000015-1, "PTC RESET FUSE 13.2V 500MA 1210", Ambient Temperature Range High=+85°C, Ambient Temperature Range Low=-40°C, Current Rating=40A, Hold Current=0.5A, Manufacturer=Littelfuse, Package=microSMD, Resistance=0.25-0.9Ω, Temperature="to +85°C", Trip Current=1A, Voltage Rating=13.2V, Automotive=No, Category=Fuse, ComponentLink2Description=Datasheet, ComponentLink2URL=https://www.littelfuse.com/~/media/electronics/datasheets/resettable_ptcs/littelfuse_ptc_microsmd_datasheet.pdf.pdf, Device Class L1="Circuit Protection", Device Class L2="PTC Resettable Fuses", Device Class L3=unset, Digikey Description="PTC RESET FUSE 13.2V 500MA 1210", Height=0.62mm, Lead Free=Yes, Manufacturer Part Number=MICROSMD050F-2, Octopart=https://octopart.com/microsmd050f-2-littelfuse-74214982, RoHS=TRUE, Temperature Range High=+85°C, Trip Time=0.05s
IC1: "Integrated Circuit", Manufacturer_Name="Texas Instruments", Mouser Part Number=595-UCC33420QRAQRQ1, Arrow Part Number=UCC33420QRAQRQ1, Arrow Price/Stock=https://www.arrow.com/en/products/ucc33420qraqrq1/texas-instruments?utm_currency=USD&region=nac, Datasheet Link=https://www.ti.com/lit/ds/symlink/ucc33420-q1.pdf?ts=1741595347894&ref_url=https%253A%252F%252Fwww.ti.com%252Fproduct%252FUCC33420-Q1, Height=1.05mm, Manufacturer_Part_Number=UCC33420QRAQRQ1, Mouser Price/Stock=https://www.mouser.co.uk/ProductDetail/Texas-Instruments/UCC33420QRAQRQ1?qs=7%2F6SraaimPSitAwgIt4uJA%3D%3D
J1: library part CMP-002-00267-1, "USB-C (USB TYPE-C) USB 2.0 Receptacle Connector 24 (16+8 Dummy) Position Surface Mount, Right Angle; Through Hole", Case/Package=None, Check_prices=https://www.snapeda.com/parts/USB4105GFA060/Global+Connector+Technology/view-part/?ref=eda, Component Type=Standard, Design Item ID=USB4105GFA060, MF="Global Connector Technology", MP=USB4105GFA060, Pins=16, SnapEDA_Link=https://www.snapeda.com/parts/USB4105GFA060/Global+Connector+Technology/view-part/?ref=snap, Source=USB4105GFA060.SchLib
J2: library part CMP-17439-000362-1, "CONN HEADER R/A 5POS 2.5MM", Flammability Rating="UL94 V-0", Insulation Color=Natural, Max Operating Temperature=85°C, Min Operating Temperature=-25°C, Voltage Rating=250V, Connector Type=Header, Contact Finish - Mating=TIN, Contact Material=Brass, Contact Shape=Square, Contact Type="Male Pin", Fastening Type=Detent, Insulation Material=Nylon, Lead Free="Lead Free", Mount="Through Hole", Number of Positions=5, Number of Rows=1, Packaging=Bulk, Pitch=2.5mm, Series=XH, Termination=Press-Fit
J3: library part CMP-05380-000001-1, "CONN IC DIP SOCKET ZIF 20POS GLD", Current Rating=1A, Manufacturer=3M, Package=0, Socket Package=DIP20, Temperature="-55°C to +125°C", Temperature Range High=+125°C, Temperature Range Low=-55°C, Automotive=No, Category=Conn, ComponentLink2Description=Datasheet, ComponentLink2URL=https://multimedia.3m.com/mws/media/494546O/3mtm-dip-sockets-100-2-54-mm-ts0365.pdf, Conn Gender=Female, Conn Orientation=Vertical, Contact Material=Gold,Nickel, Device Class L1=Connectors, Device Class L2="IC and Component Sockets", Device Class L3=unset, Digikey Description="CONN IC DIP SOCKET ZIF 20POS GLD", Height=24mm, Is Female=yes, Lead Free=Yes, Manufacturer Part Number=220-3342-00-0602J, Mouser Description="IC & Component Sockets 0.100 DIP SOCKET 20 Contact Qty.", Number Of Contacts=20, Number of Rows=2, Octopart=https://octopart.com/220-3342-00-0602j-3m-108647, Pitch=2.54mm, RoHS=TRUE, Standoff Height=0.38mm
R1: library part CMP-009-085524-1, "RES 1K OHM 1% 1/4W 1206", Part Number=RC1206FR-101KL
R2 R3: library part CMP-009-086345-1, "RES 5.1K OHM 0.1% 1/4W 1206", Part Number=RP1206BRD075K1L
R4: "Resistor", Manufacturer_Name=Venkel, Datasheet Link=https://page.venkel.com/hubfs/Resources/Datasheets/UPTF-Series.pdf, Height=0.55mm, Manufacturer_Part_Number=UPTF0603-16W-N-1781FT
R5: library part CMP-009-075815-1, "RES 1.69 KOHMS 0.1% 0.4W 1206", Part Number=RQ73C2B1K69BTD
R6: library part CMP-009-090039-1, "RES SMD 442 OHM 0.1% 1/4W 1206", Part Number=RT1206BRD07442RL
R7: library part CMP-04015-006256-1, "5.56kΩ ±0.1% 0.125W, 1/8W Chip Resistor 0805 (2012 Metric) Moisture Resistant Thin Film"
R8 R12 R13 R14 R15 R16 R18: library part CMP-009-080149-1, "RES SMD 2.49K OHM 1% 1/4W 1206", Part Number=KTR18EZPF2491
R9: library part CMP-2003-02290-2, "RES Thick Film, 57.6kΩ, 1%, 0.25W, 100ppm/°C, 1206", Case Code (Imperial)=1206, Case Code (Metric)=3216, Max Operating Temperature=155°C, Max Power Dissipation=250mW, Min Operating Temperature=-55°C, Package Quantity=5000, Resistance=57.6kR, Temperature Coefficient=100ppm/°C, Tolerance=1%, Voltage Rating=200V, Case/Package=1206, Composition="Thick Film", Contact Plating=Tin, Depth=1.6mm, Features="Automotive AEC-Q200", Height=0.55mm, Height - Seated (Max)=0.024inch, Lead Free="Lead Free", Length=3.2mm, Military Standard=Not, Number of Pins=2, Number of Terminations=2, Packaging="Tape and Reel", Power Rating=250mW, Radiation Hardening=No, Voltage Rating (DC)=200V, Weight=0.000353oz, Width=0.063inch
R10: library part CMP-009-044138-1, "RES 4.17K OHM 0.1% 1/10W 0603", Part Number=RN73R1JTTD4171B25
R11: library part CMP-009-083477-1, "RES SMD 2.55K OHM 0.1% 1/4W 1206", Part Number=RT1206BRD072K55L
R17: library part CMP-009-082226-1, "RES 1.13K OHM 1% 1/4W 1206", Part Number=RK73H2BTTD1131F
R19: library part CMP-009-077766-1, "RES SMD 5K OHM 0.1% 1/4W 1206", Part Number=RT1206BRD075KL
R20 R23: library part CMP-009-086150-1, "RES 10K OHM 0.1% 1/4W 1206", Part Number=RP1206BRD0710KL
R21 R22 R24 R25: library part CMP-009-093445-1, "RES 2.2K OHM 10% 1/2W 1210", Part Number=SG732ETTD222K
R26: library part CMP-009-090155-1, "RES SMD 125 OHM 0.1% 1/4W 1206", Part Number=RT1206BRD07125RL
R27 R28 R30: library part CMP-009-078908-1, "RES 10K OHM 0.1% 1/4W 1206", Part Number=TNPW120610K0BETY
R29: library part CMP-009-083572-1, "RES 20K OHM 0.1% 1/4W 1206", Part Number=TNPW120620K0BYEN
R31 R32: library part CMP-009-078373-1, "RES 4.7K OHM 0.1% 1/4W 1206", Part Number=TNPW12064K70BEEA
R33 R34: library part CMP-009-076876-1, "RES 100K OHM 0.1% 1/4W 1206", Part Number=TNPW1206100KBEEA
U1: library part CMP-0534-00647-1, "Full/Low Speed USB Digital Isolator, 2 Channels, 5 kV rms, 3.1 to 5.5 V, -40 to 105 degC, 16-Pin SOIC (RW-16), RoHS, Tube", Manufacturer="Analog Devices", Temperature Range="-40 to 105 degC", Voltage Isolation="5 kVrms", CIN="10 pF Typ.", ComponentLink1Description="Manufacturer URL", ComponentLink1URL=http://www.analog.com/en/index.html, ComponentLink2Description=Datasheet, ComponentLink2URL=http://www.analog.com/static/imported-files/data_sheets/ADuM4160.pdf, ComponentLink3Description="Package Specification", ComponentLink3URL=http://www.analog.com/static/imported-files/packages/PKG_PDF/SOIC_WIDE%20(RW)/RW_16.pdf, Data Rate="12 Mbps Max.", DatasheetVersion="Rev. D", IDD@12 Mbps="8 mA Max.", Mounting Technology="Surface Mount", Number Of Channels=2, PackageDescription="16-Pin Small Outline Integrated Circuit, Body 10.3 x 7.5 mm, Pitch 1.27 mm", PackageVersion=Mar-07, Packing=Tube, PartNumber=ADUM4160BRWZ, RoHS=TRUE, VBUS="3.1 to 5.5 V"
U2: library part CMP-04917-000300-1, "IC REG LINEAR 3.3V 300MA SOT23-5", RoHS Compliant=Yes
U3: library part CMP-0511-00012-1, "Single-Chip USB to UART Bridge, 1024 Bytes EEPROM, -40 to 85 degC, 28-pin QFN, Tube", Manufacturer="Silicon Labs", Code_IPC=J-STD-020C, Code_JEDEC=MO-220, ComponentLink1Description="Manufacturer URL", ComponentLink1URL=http://www.silabs.com/, ComponentLink2Description=Datasheet, ComponentLink2URL=http://www.silabs.com/Support%20Documents/TechnicalDocs/CP2102-9.pdf, ComponentLink3Description="Package Specification", ComponentLink3URL=http://www.silabs.com/Support%20Documents/TechnicalDocs/C8051T61x.pdf, DatasheetVersion="Rev. 1.5", EEPROM="1024 Bytes", Internal Oscillator=TRUE, Mounting Technology="Surface Mount", PackageDescription="28-Pin Quad-Flat No-Leads Package, Body 5 x 5 mm, Pitch 0.5 mm", PackageReference=QFN-28, PartNumber=CP2102-GM, Sub-Family="USB Bridges"
U4 U5 U6 U7 U8: library part CMP-0366-00210-1, "Low Voltage Adjustable Precision Shunt Regulator, 39 ppm / degC, 15 mA, 0 to 70 degC, 3-pin TO-92 (LP), Pb-Free (RoHS)", Manufacturer="Texas Instruments", Rating=Catalog, Temp Coeff(Max)(ppm/ degree C)=129, Temp Coeff(Typ)(ppm/ degree C)=39, Code_JEDEC=TO-226, ComponentLink1Description="Manufacturer URL", ComponentLink1URL=http://www.ti.com/, ComponentLink2Description=Datasheet, ComponentLink2URL=http://www.ti.com/general/docs/lit/getliterature.tsp?genericPartNumber=TLV431&fileType=pdf, ComponentLink3Description="Package Specification", ComponentLink3URL=http://www.ti.com/litv/pdf/msot002a, DatasheetVersion=SLVS139T, Eco-Plan="Green (RoHS & no Sb/Br)", Initial Accuracy @ 25/deg C(%)=1.5, Iout/Iz(Max)(mA)=15, Min Iz for Regulation(uA)=80, Mounting Technology="Through Hole", PackageDescription="Plastic Cylindrical Package, Formed Lead Option (TO-92)", PackageReference=LP3, PackageVersion=4040001-2/C, PartNumber=TLV431CLPE3, SubFamily="Shunt Voltage Reference", VO Adj(Max)(V)=6, VO Adj(Min)(V)=1.24
U9: library part CMP-031-00033-1, "Mainstream Arm Cortex-M0+ MCU with 128 Kbytes of Flash memory, 24 Kbytes RAM, 48 MHz CPU, 2x USART, timers, ADC, comm. I/F, USB FS, 2-3.6V", Manufacturer_Name=STMicroelectronics, Component Type=Standard, Copyright="Copyright (C) 2025 Ultra Librarian. All rights reserved.", Design Item ID=STM32C071RBT6, Manufacturer_Part_Number=STM32C071RBT6, Pins=64, RefDes=RefDes, Source=STM32C071RBT6.SchLib, Type=Type
U10 U15 U18 U20: library part CMP-0798-00195-1, "1.8 to 5.5 V / +/-2.5 V, CMOS Low Voltage 3 Ohm, 8-Channel Multiplexer, -40 to 125 degC, 16-pin SOP (RU-16), Reel", Manufacturer="Analog Devices", Bandwidth (Hz)=55M, Code_JEDEC=MO-153AB, ComponentLink1Description="Manufacturer URL", ComponentLink1URL=http://www.analog.com/en/index.html, ComponentLink2Description=Datasheet, ComponentLink2URL=http://www.analog.com/static/imported-files/data_sheets/ADG708_709.pdf, ComponentLink3Description="Package Specification", ComponentLink3URL=http:/www.analog.com/static/imported-files/packages/36244347913743854010197452789RU16.pdf, DatasheetVersion="Rev. C", Max Analog Signal Range="Vss to Vdd", Mounting Technology="Surface Mount", PackageDescription="16-Pin Thin Shrink Small Outline Package, Body 5 x 4.4 mm, Pitch 0.65 mm", PackageReference=RU-16, PackageVersion=Nov-02, Packing=Reel, PartNumber=ADG708BRUZ-REEL, Ron (ohms)=3, Supply V Guar Performance="Dual_(+/-2.5V), Single_(+3V), Single_(+5V)", t transition (s)=14n
U11: library part CMP-0859-00457-3, "Single-Bit Dual-Supply Bus Transceiver with Configurable Voltage Translation and 3-State Outputs, DCK0006A, SMALL T&R", F @ Nom Voltage(Max)(Mhz)=150, Generic Part Number=SN74LVC1T45, ICC @ Nom Voltage(Max)(mA)=0.004, Manufacturer="Texas Instruments", Operating Temperature Range(C)="-40 to 85", Rating=Catalog, tpd @ Nom Voltage(Max)(ns)=15.5,8,5.8,4.4, Voltage(Nom)(V)=1.8,2.5,3.3,5, 3-State Output=Yes, Bits(#)=1, DatasheetVersion=SCES515K, Input Type=CMOS/TTL, Logic=True, Output Drive (IOL/IOH)(Max)(mA)=32/-32, Output Type=CMOS, PackageReference=DCK0006A, Schmitt Trigger=No, Sub-Family="Dual Supply Translator", Technology Family=LVC, VCC(Max)(V)=5.5, VCC(Min)(V)=1.65
U12 U13: library part CMP-011-00018-1, "I2C CMOS 8 X 12 Analog Switch Array with Dual/Single Supplies", Manufacturer_Name="Analog Devices Inc", Component Type=Standard, Copyright="Copyright (C) 2025 Ultra Librarian. All rights reserved.", Design Item ID=ADG2128BCPZ-REEL7, Manufacturer_Part_Number=ADG2128BCPZ-REEL7, Pins=33, RefDes=RefDes, Source=ADG2128BCPZ-REEL7.SchLib, Type=Type
U14: library part CMP-0387-00789-2, "Miniature, 2 W Isolated Unregulated DC-DC Converter, -40 to 85 degC, 7-pin DIP (NVA7), Pb-Free (RoHS)", Manufacturer="Texas Instruments", Code_JEDEC=MS-001-AA, ComponentLink1Description="Manufacturer URL", ComponentLink1URL=http://www.ti.com/, ComponentLink2Description=Datasheet, ComponentLink2URL=http://www.ti.com/general/docs/lit/getliterature.tsp?genericPartNumber=DCP020509&fileType=pdf, ComponentLink3Description="Package Specification", ComponentLink3URL=http://www.ti.com/lit/ml/mpdi058a/mpdi058a.pdf, ComponentLink4Description="URL Link1", ComponentLink4URL="Samples URL:http://www.ti.com/product/dcp020509#samples", DatasheetVersion=SBVS011K, Eco-Plan="Pb-Free (RoHS)", Iout(Max)(A)=0.222, Mounting Technology="Through Hole", PackageDescription="7-Pin Plastic In-Line, Body 6.61 x 19.18 mm", PackageReference=NVA0007A, PackageVersion=4202489/B, PartNumber=DCP020509P, Regulated Outputs(#)=1, SubFamily="1 W & 2 W Miniature", Vin(Max)(V)=5.5, Vin(Min)(V)=4.5, Vout(Max)(V)=9.45, Vout(Min)(V)=8.55
U16: library part CMP-0798-00149-1, "1.8 to 5.5 V / +/-2.5 V, CMOS Low Voltage 3 Ohm, 4-Channel Multiplexer, -40 to 125 degC, 16-pin SOP (RU-16), Reel", Manufacturer="Analog Devices", Bandwidth (Hz)=55M, Code_JEDEC=MO-153AB, ComponentLink1Description="Manufacturer URL", ComponentLink1URL=http://www.analog.com/en/index.html, ComponentLink2Description=Datasheet, ComponentLink2URL=http://www.analog.com/static/imported-files/data_sheets/ADG708_709.pdf, ComponentLink3Description="Package Specification", ComponentLink3URL=http:/www.analog.com/static/imported-files/packages/36244347913743854010197452789RU16.pdf, DatasheetVersion="Rev. C", Max Analog Signal Range="Vss to Vdd", Mounting Technology="Surface Mount", PackageDescription="16-Pin Thin Shrink Small Outline Package, Body 5 x 4.4 mm, Pitch 0.65 mm", PackageReference=RU-16, PackageVersion=Nov-02, Packing=Reel, PartNumber=ADG709BRUZ-REEL, Ron (ohms)=3, Supply V Guar Performance="Dual_(+/-2.5V), Single_(+3V), Single_(+5V)", t transition (s)=14n
U17: library part CMP-00256-1, "24 Bit Analog to Digital Converter 2 Input 1 Sigma-Delta 16-PDIP", Package=Package, Check_prices=https://www.snapeda.com/parts/NAU7802KGI/Nuvoton/view-part/?ref=eda, Component Type=Standard, Design Item ID=NAU7802KGI, MF="Nuvoton Technology Corporation of America", MP=NAU7802KGI, Pin Count=16, SnapEDA_Link=https://www.snapeda.com/parts/NAU7802KGI/Nuvoton/view-part/?ref=snap, Source=NAU7802KGI.SchLib
U19: library part CMP-0057-00384-3, "High Performance, High Fidelity Rail-to-Rail Input/Output Audio Operational Amplifier, 8-pin Narrow SOIC, Pb-Free", Manufacturer="Texas Instruments", PackageTopMarking=NSZXTT*L49721*MA, PowerWise=N, Code_IPC=SOIC127P600-8, Code_JEDEC=MS-012-AA, ComponentLink1Description="Datasheet URL", ComponentLink1URL=http://www.ti.com/general/docs/lit/getliterature.tsp?genericPartNumber=LME49721&fileType=pdf, CompType="Audio IC", PackageDescription="SOIC Narrow, 4.9 x 3.9 x 1.45mm, 8 Lead, 1.27mm Pitch", PackageReference=D0008A, PinCount=8, RoHS=Y
Y1: library part CMP-27762-006050-1, "Crystal 24MHz ±10ppm 10pF SMD-4 5mm x 3.2mm", Case/Package=CSMD, ESR (Equivalent Series Resistance)=50R, Frequency=24MHz, Frequency Stability=10ppm, Load Capacitance=10pF, Max Operating Temperature=60°C, Min Operating Temperature=-10°C, Operating Frequency="24 MHz", Package Quantity=1000, Resistor Type=Ceramic, Depth=3.2mm, Frequency Tolerance=10ppm, Height=0.043inch, Lead Free="Lead Free", Length=5mm, Mount="Surface Mount", Number of Pins=4, Packaging="Tape and Reel", Radiation Hardening=No, REACH SVHC="No SVHC", RoHS Compliant=Yes, Series=ABM3B, Termination=SMD/SMT, Tolerance=10ppm, Width=0.126inch

## Free pads (board coordinates)
  round 6.35 hole 3.175 paste-2539.97: MH1(174,29) MH2(174,123) MH3(29.5,123) MH4(29.5,29.5)

## Via types
v1: diameter 0.7, hole 0.3, Top Layer to Bottom Layer, 241 vias

## Nets (pads, with @x,y where several pads share a name; then routed paths per layer and width w, separated by ;. In a path a pad name is that pad's centre, name@x,y a point inside that pad or via, vN(x,y) a via of type N, cw(c..) or ccw(c..) an arc to the next point about the centre after c; other vN are vias at no path point)
2X0: J3.16 U13.3 U18.4 | length 72.7
  Top Layer w0.3: J3.16@111.5,72.7 111.8,72.7 115.177,69.323 122,62.5 132.5,62.5 133.798,63.798 U13.3@133.798,68.298 ; U18.4@128.875,51.675 132.175,51.675 135.5,55 v1(135.5,58)
  Bottom Layer w0.3: J3.16@111.5,72.7 120.2,64 129.637,64 132.28,61.357 132.28,61.22 134,59.5 v1(135.5,58)
2X1: J3.15 U13.4 U18.5 | length 69.1
  Top Layer w0.3: J3.15@111.5,70.16 111.777,69.883 111.777,69.223 119,62 133,62 134.298,63.298 U13.4@134.298,68.298 ; U18.5@128.875,52.325 131.825,52.325 134,54.5 v1(134,57)
  Bottom Layer w0.3: J3.15@111.5,70.16 118.16,63.5 128.364,63.5 134,57.864 v1(134,57)
2X2: J3.14 U13.5 U18.6 | length 64.3
  Top Layer w0.3: J3.14@111.5,67.62 117.62,61.5 133.136,61.5 134.798,63.161 U13.5@134.798,68.298 ; U18.6@128.875,52.975 130.975,52.975 132.5,54.5 v1(132.5,57.897)
  Bottom Layer w0.3: J3.14@111.5,67.62 116.62,62.5 127.897,62.5 v1(132.5,57.897)
2X3: J3.13 U13.6 U18.7 | length 60.3
  Top Layer w0.3: J3.13@111.5,65.08 115.58,61 133.5,61 135.298,62.798 U13.6@135.298,68.298 ; U18.7@128.875,53.625 130.625,53.625 131.5,54.5 131.5,56.5 v1(130,58)
  Bottom Layer w0.3: J3.13@111.5,65.08 111.717,64.863 112.556,64.863 115.979,61.44 126.56,61.44 v1(130,58)
2X4: J3.12 U13.7 U18.9 | length 46.8
  Top Layer w0.3: J3.12@111.5,62.54 113.54,60.5 133.636,60.5 135.86,62.724 135.86,67.889 135.81,67.939 135.81,68.285 U13.7@135.798,68.298 ; v1(119.9,57.5) U18.9@123.125,54.275
  Bottom Layer w0.3: J3.12@111.5,62.54 113.46,62.54 118.5,57.5 v1(119.9,57.5)
2X5: J3.11 U13.8 U18.10 | length 46.1